# Altium PCB EB2018-LW27U19-P-MB03A(KL18).PcbDoc (part 1 of 2)
Units mm, origin at the board's own origin, x right, y up, seen from the top; angles counter-clockwise.
Board outline 338.42 x 232.18 mm, 2 copper layers (Top Layer, Bottom Layer); 163 components, 101 nets, 459 pads, 120 vias.
Unrouted connection lines stored in the file: 2.
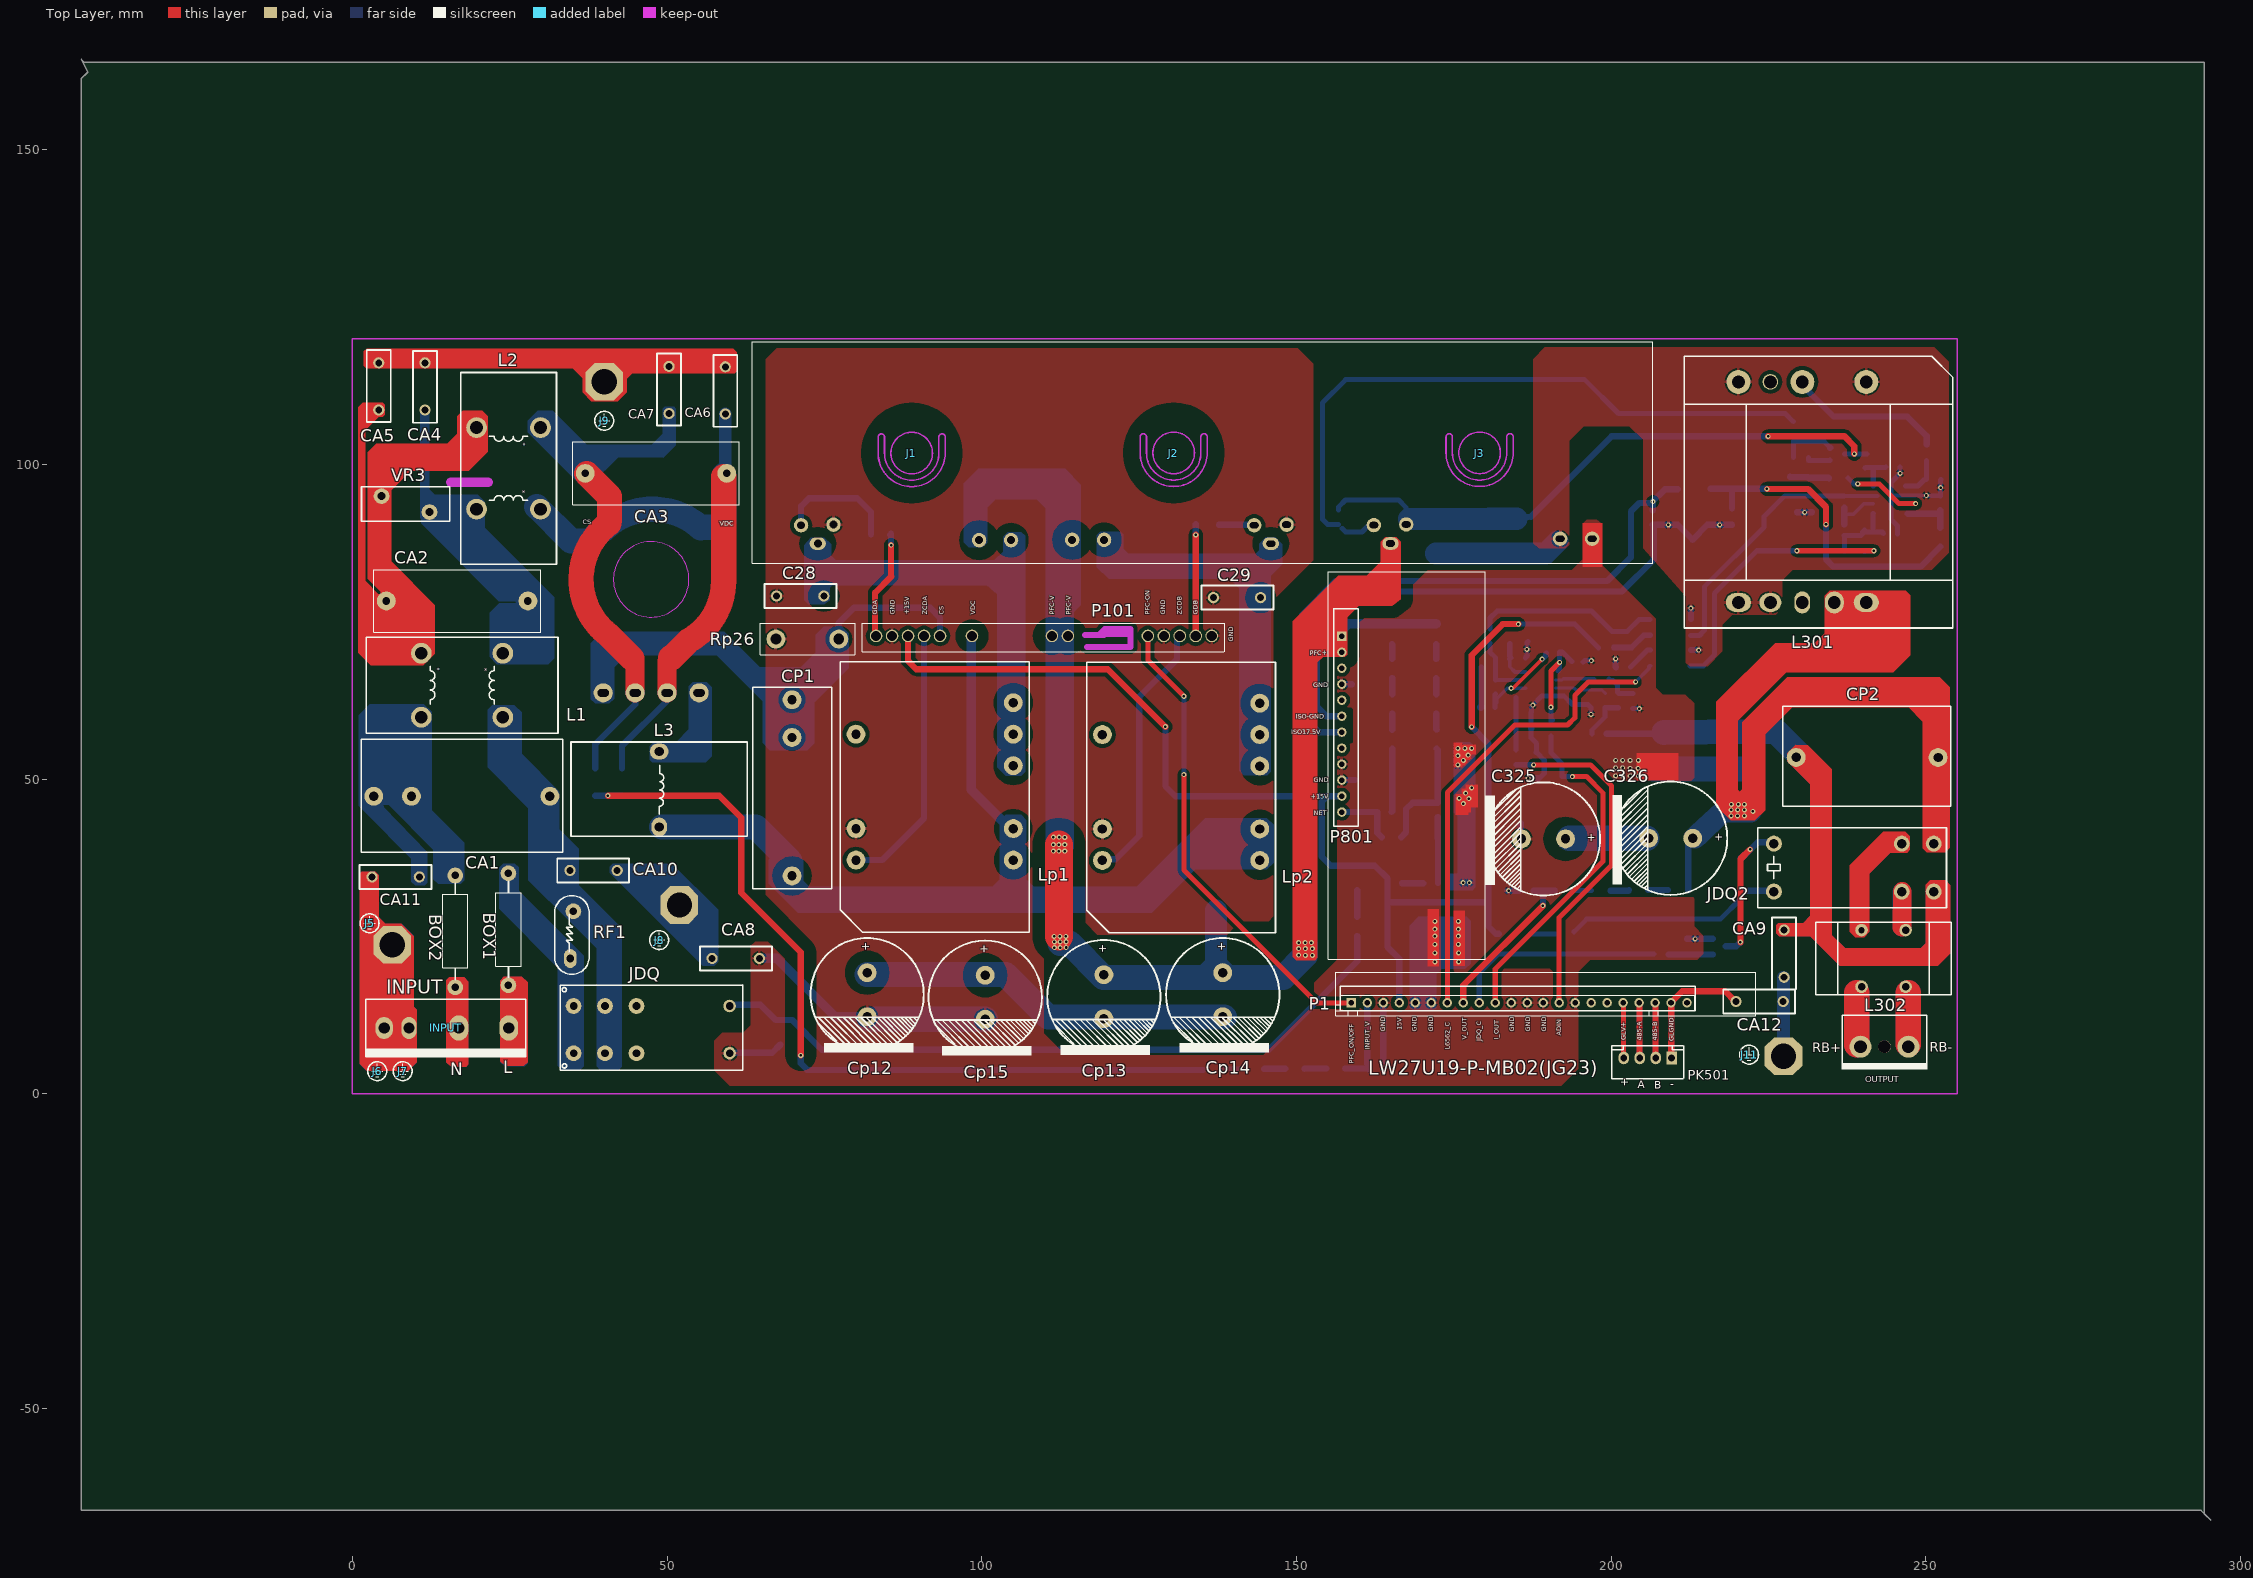
[diagram p0: Top Layer view]
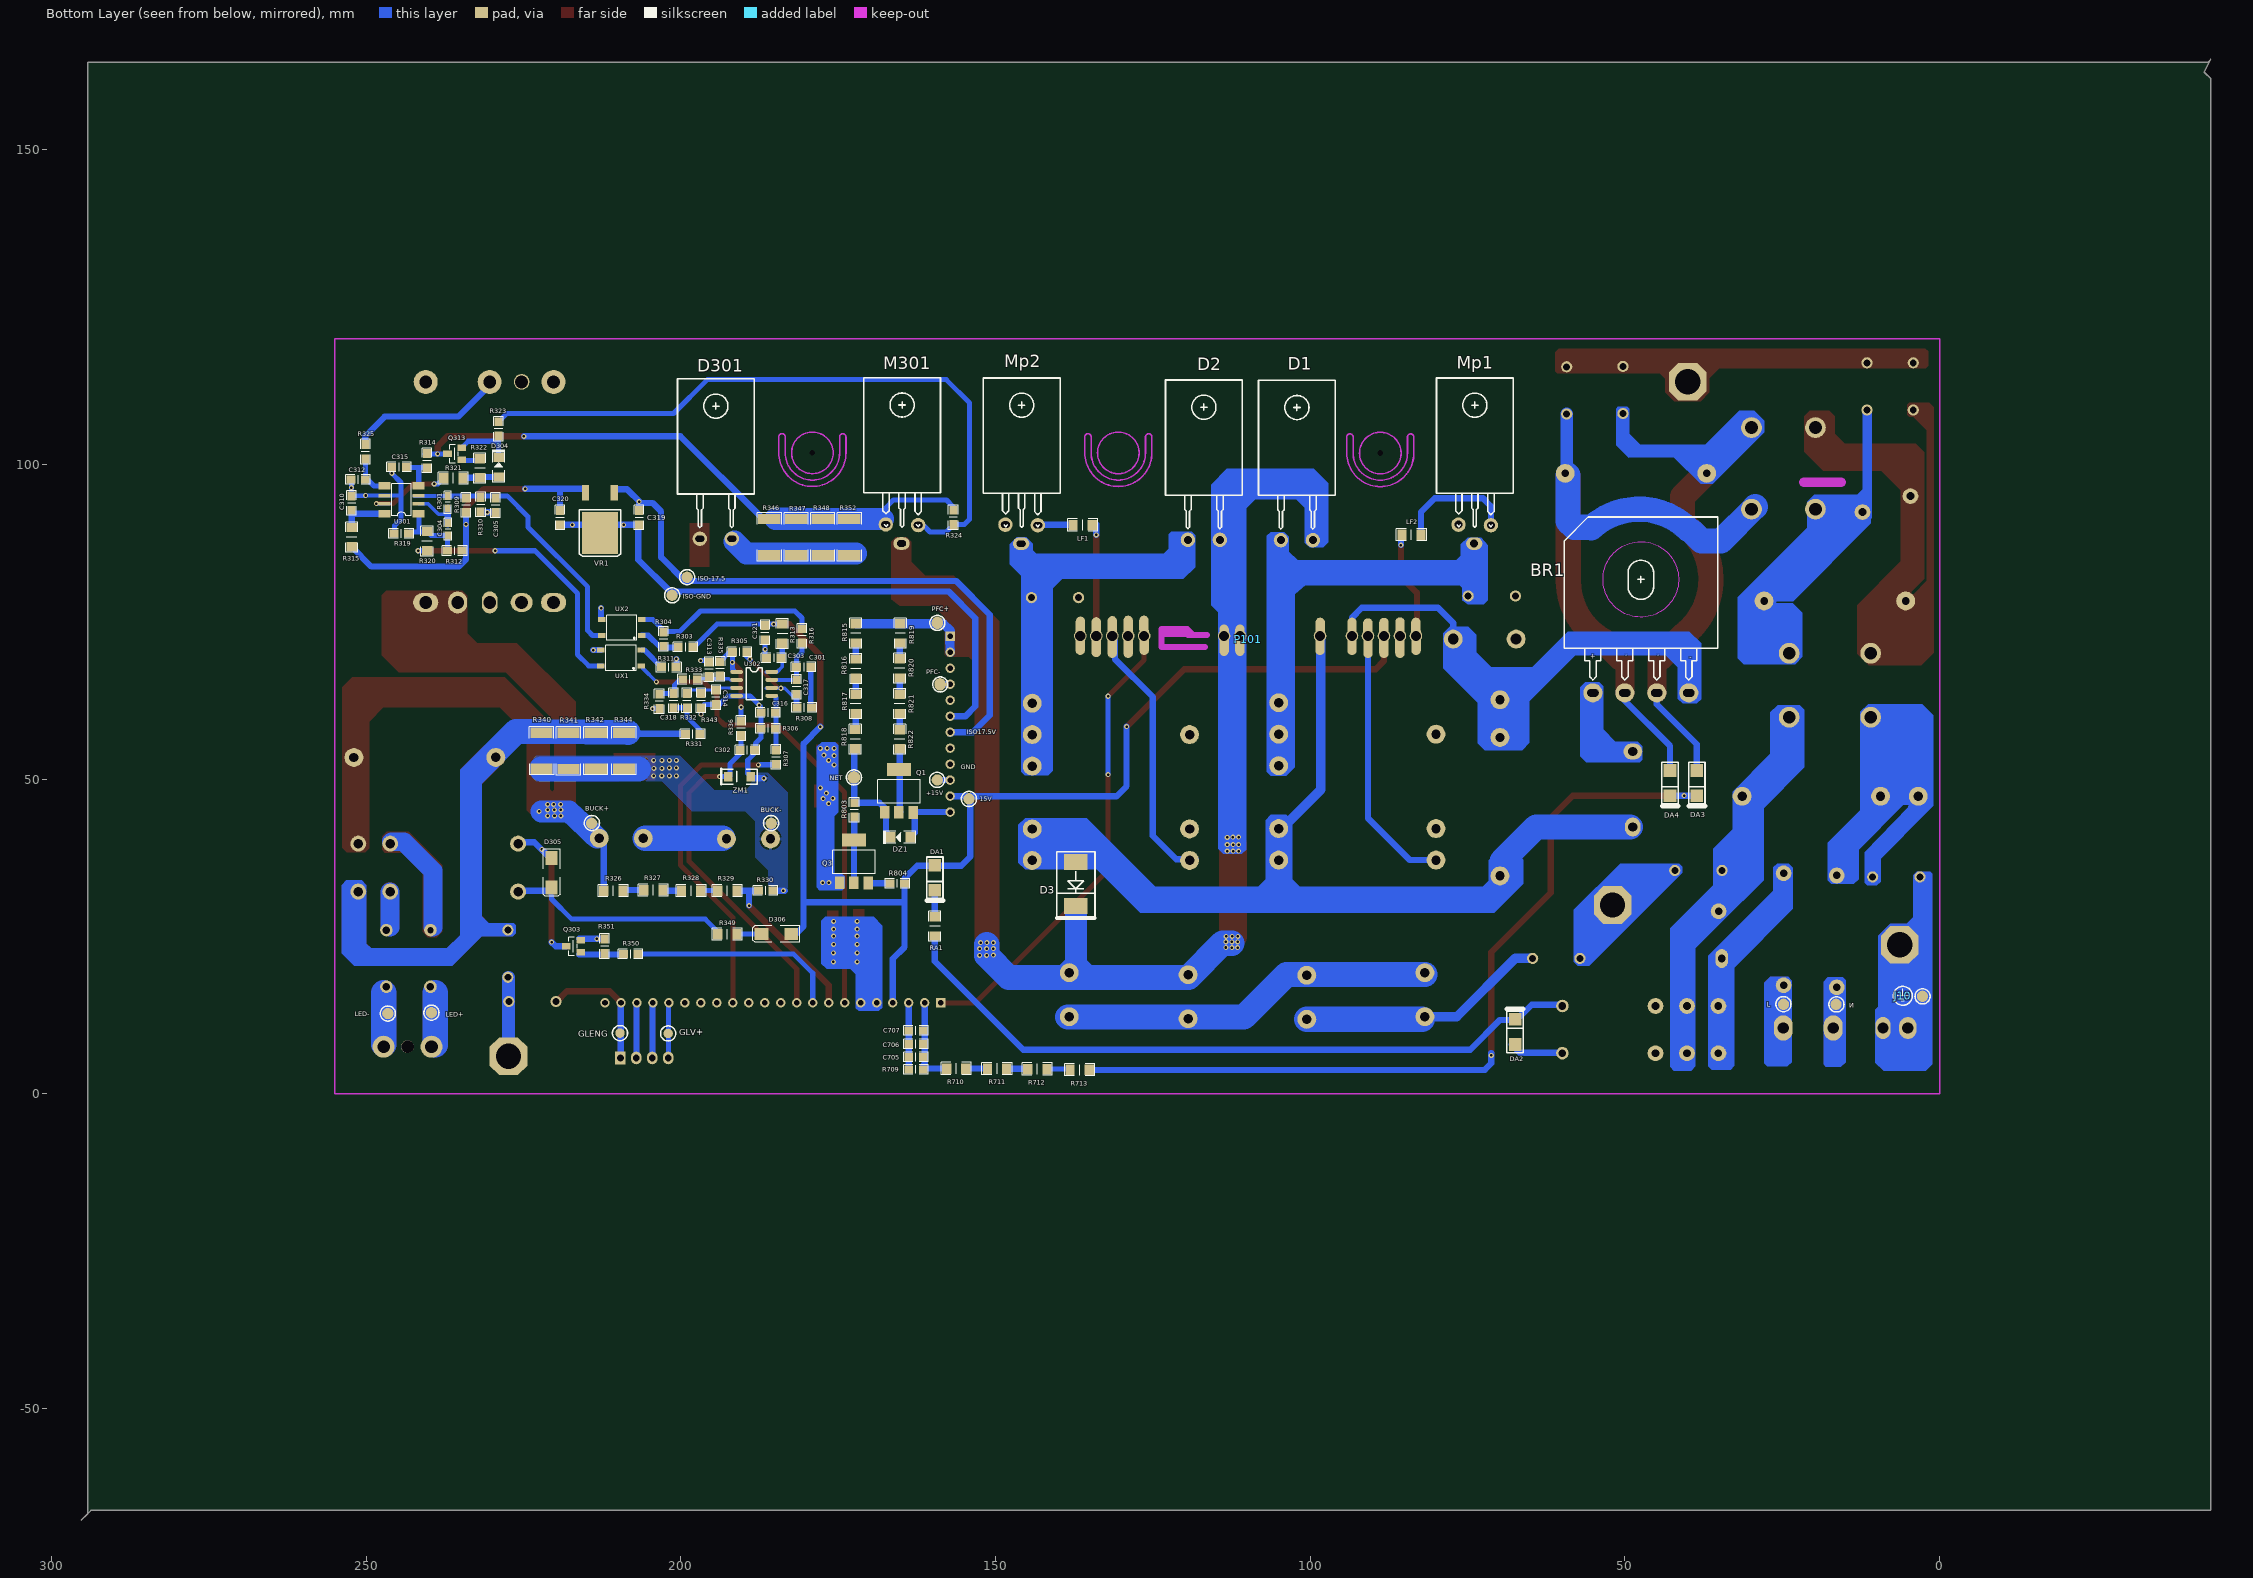
[diagram p1: Bottom Layer view, seen from below]

## Layer stack, top to bottom
Top Solder: solder mask 0.0102, Solder Resist, Dk 3.5
Top Layer: signal copper 0.0356
Dielectric1: dielectric 0.32, FR-4, Dk 4.8
Bottom Layer: signal copper 0.0356
Bottom Solder: solder mask 0.0102, Solder Resist, Dk 3.5

## Board outline
-43.105,164.407 -42.586,163.889 294.28,163.889 294.28,-66.735 295.316,-67.771 293.762,-66.217 -43.105,-66.217 -43.105,161.298 -42.068,162.334

## Design rules (kind name [scope] priority, off if disabled: settings)
Clearance Clearance_1 [InNet('NetDA3_2')] p1: gap=2 ignorepadtopadclearanceinfootprint=FALSE
Clearance Clearance_30 [InNet('NetC326_1')] p2: gap=2 ignorepadtopadclearanceinfootprint=FALSE
Clearance Clearance_29 [InNet('NetC325_1')] p3: gap=2 ignorepadtopadclearanceinfootprint=FALSE
Clearance Clearance_22 [InNet('NetCp12_1')] p4: gap=2 ignorepadtopadclearanceinfootprint=FALSE
Clearance Clearance_21 [InNet('PFC_V')] p5: gap=2 ignorepadtopadclearanceinfootprint=FALSE
Clearance Clearance_20 [InNet('NetC29_1')] p6: gap=1.6 ignorepadtopadclearanceinfootprint=FALSE
Clearance Clearance_19 [InNet('NetC28_1')] p7: gap=1.6 ignorepadtopadclearanceinfootprint=FALSE
Clearance Clearance_18 [InNet('VDC')] p8: gap=1.6 ignorepadtopadclearanceinfootprint=FALSE
Clearance Clearance_35 [InNamedPolygon('GND_L01_P051')] p9: gap=0.6 ignorepadtopadclearanceinfootprint=FALSE
Clearance Clearance_25 [InNet('ISO-GND')] p10: gap=0.6 ignorepadtopadclearanceinfootprint=FALSE
Clearance Clearance_34 [InNet('NetDA3_2')] p11: gap=0.6 ignorepadtopadclearanceinfootprint=FALSE
Clearance Clearance_33 [InNamedPolygon('GND_L01_P028')] p12: gap=0.6 ignorepadtopadclearanceinfootprint=FALSE
Clearance Clearance_32 [InNamedPolygon('GND_L01_P040')] p13: gap=0.6 ignorepadtopadclearanceinfootprint=FALSE
Clearance Clearance_31 [InNet('15V')] p14: gap=0.6 ignorepadtopadclearanceinfootprint=FALSE
Clearance Clearance_27 [InNamedPolygon('GND_L01_P038')] p15: gap=0.6 ignorepadtopadclearanceinfootprint=FALSE
Clearance Clearance_26 [InNamedPolygon('ISO-GND_L01_P036')] p16: gap=0.6 ignorepadtopadclearanceinfootprint=FALSE
Clearance Clearance_28 [InNamedPolygon('GND_L01_P038')] p17: gap=0.6 ignorepadtopadclearanceinfootprint=FALSE
Clearance [All] p18: gap=0.6 ignorepadtopadclearanceinfootprint=FALSE
DiffPairsRouting [All] p1: maxlimit=4.5 minlimit=0.508 mostfreqgap=0.508 toplayer_minwidth=0.381 toplayer_maxwidth=0.381 toplayer_prefwidth=0.381 bottomlayer_minwidth=0.381 bottomlayer_maxwidth=0.381 bottomlayer_prefwidth=0.381 maxuncoupledlength=12.7
PlaneClearance [All] p1: clearance=2
PlaneConnect [All] p1: planeconnectstyle=Relief reliefexpansion=0.508 reliefentries=4 reliefconductorwidth=1 reliefairgap=0.508
PolygonConnect [All] p1: connectstyle=Relief reliefconductorwidth=0.5 reliefentries=4 polygonreliefangle="90 Angle" airgapwidth=0.254
RoutingVias [All] p1: holewidth=0.4 width=0.8 viastyle="Through Hole" minholewidth=0.4 minwidth=0.8 maxholewidth=0.711 maxwidth=1.27
SMDToCorner [All] p1: distance=0
SilkToSolderMaskClearance SilkscreenOverComponentPads [IsPad] p1: minsilkscreentomaskgap=0.254 clearancetoexposedcopper=TRUE
SolderMaskExpansion [All] p1: expansion=0.102 istentingtop=FALSE
Width [All] p1: maxlimit=10 minlimit=0.254 preferedwidth=2 minimp=50.000000 maximp=50.000000 favimp=50.000000
26 further rules are at their usual default settings.

## Classes and differential pairs
component class "Components Class 1": C304 C305 C310 C312 C315 Q313 R301 R310 R312 R314 R315 R319 R320 R321 R322 R325 U301
component class LW1U21-MB03(HG27)-双通道3: BOX1 BOX2 BOX4 BR1 C28 C29 C301 C302 C303 C304 C305 C310 C312 C315 C316 C317 C318 C320 C321 C325 C326 C705 C706 C707 CA1 CA2 CA3 CA4 CA5 CA6 CA7 CA8 CA10 CA11 CA12 CP1 Cp12 Cp13 Cp14 Cp15 CX1 CX2 CX3 CY3 CY4 CY5 D1 D2 D3 D301 D304 D305 D306 DA1 DA2 DA3 DA4 DZ1 INPUT J1 J2 J3 J5 J6 JDQ JDQ2 L1 L2 L302 LF2 Lp2 M301 Mp1 Mp2 OUTPUT P1 Q1 Q3 Q303 Q313 R301 R305 R306 R307 R308 R309 R310 R312 R313 R314 R315 R316 R319 R320 R321 R322 R323 R324 R325 R331 R332 R333 R334 R335 R336 R340 R341 R342 R346 R347 R348 R349 R350 R351 R709 R710 R711 R712 R713 R803 R804 R815 R816 R817 R818 R819 R820 R821 R822 RA1 Rp26 RT? U301 U302 VR3 ZM1

## Components (designator, comment, footprint, x,y, rotation, side; value= is the part's Value field where it differs from the comment)
BOX1 "10A/350V" 10A保险 24.795,17.247 r90 top
BOX2 "10A/350V" 10A保险 16.341,34.689 r270 top
BR1 "" BRIDGE-TK 35.281,91.645 r0 bottom
C28 "221/1KV" Y2C 75.037,79.119 r270 top
C29 "221/1KV" Y2C 144.441,78.862 r270 top
C301 "" RW0805 180.521,67.796 r90 bottom
C302 "0805" RW0805 189.448,54.644 r270 bottom
C303 "301008" RW0805 185.265,69.278 r90 bottom
C304 "" RW0603 237.026,90.722 r0 bottom
C305 "301008" RW0805 229.461,93.526 r180 bottom
C310 "301009" RW0805 252.326,93.865 r180 bottom
C312 "301001" RW0805 251.301,97.615 r90 bottom
C313 "301013" RW0805 195.569,67.443 r0 bottom (schematic designator C321)
C314 "301013" RW0805 194.463,62.992 r0 bottom (schematic designator C321)
C315 "" RW0805 244.801,99.59 r90 bottom
C316 "301008" RW0805 186.145,60.564 r90 bottom
C317 "301008" RW0805 181.643,64.643 r180 bottom
C318 "0805" RW0805 201.2,62.484 r180 bottom
C319 "301013" RW0805 206.645,91.544 r0 bottom
C320 "301013" RW0805 219.238,91.544 r0 bottom
C321 "301013" RW0805 186.68,73.29 r0 bottom
C325 "302159" C250V/120uF 189.214,40.495 r180 top locked
C326 "302159" C250V/120uF 209.418,40.607 r180 top
C705 "301008" RW0805 162.661,5.842 r270 bottom
C706 "301008" RW0805 162.661,7.899 r270 bottom
C707 "301008" RW0805 162.661,10.063 r270 bottom
CA1 "0.22uF/440V" 2.2uF/400V#1 17.618,47.639 r0 top
CA2 "0.22uF/440V" "X2C-B 22-27" 27.896,78.305 r180 top
CA3 "0.22uF/400V" "X2C-B 22-27" 59.494,98.582 r180 top
CA4 "102/400V" Y2C 11.561,108.525 r180 top
CA5 "102/400V" Y2C 4.158,116.284 r0 top
CA6 "" Y2C 59.281,107.89 r180 top
CA7 "" Y2C 50.298,115.719 r0 top
CA8 "102/250V" Y2C 64.794,21.545 r270 top
CA9 "102/250V" Y2C 227.485,26.146 r0 top (schematic designator CA12)
CA10 "102/400V" Y2C 34.448,35.47 r90 top
CA11 "102/400V" Y2C 3.005,34.442 r90 top
CA12 "102/250V" Y2C 219.732,14.642 r90 top
CP1 "684 630V" 2.2UF/630VRCD 69.855,34.615 r90 top
CP2 "0.22uF/440V" 2.2uF/400V#2 238.197,53.792 r0 top (schematic designator CA1)
Cp12 "120UF/450V" C250V/120uF 81.786,15.694 r270 top
Cp13 "120UF/450V" C250V/120uF 119.416,15.364 r270 top
Cp14 "120UF/450V" C250V/120uF 138.303,15.691 r270 top
Cp15 "120UF/450V" C250V/120uF 100.549,15.275 r270 top
D1 "STTH810" U880#1 108.222,113.369 r0 bottom locked
D2 "STTH810" U880#1 123.005,113.42 r0 bottom locked
D3 "D19" D-SMC 137.265,36.835 r270 bottom
D301 "308006" U880#2 200.554,113.592 r0 bottom locked
D304 "307004" SOD-123 228.976,99.551 r180 bottom
D305 "M7" SMA 220.569,32.902 r90 bottom
D306 "M7" SMA 187.05,25.393 r180 bottom
DA1 "M7" M7 159.789,36.224 r270 bottom
DA2 "M7" M7 67.329,7.934 r90 bottom
DA3 "M7" M7 38.709,51.261 r270 bottom
DA4 "M7" M7 42.957,51.261 r270 bottom
DZ1 "15V/0.5W" SOD-123 165.114,40.764 r90 bottom
INPUT "INPUT" INPUT-JST-6P 24.837,10.452 r90 top
J1 "Socket" 螺丝孔 88.842,101.786 r0 top locked
J2 "Socket" 螺丝孔 130.472,101.812 r0 top locked
J3 "Socket" 螺丝孔 179.086,101.816 r0 top locked
J5 "Socket" 接地标志 2.727,27.094 r0 top
J6 "Socket" 接地标志 3.941,3.589 r0 top
J7 "Socket" 接地标志 7.991,3.589 r0 top (schematic designator J6)
J8 "Socket" 接地标志 48.743,24.42 r0 top (schematic designator J5)
J9 "Socket" 接地标志 40.012,106.945 r0 top (schematic designator J5)
J10 "Socket" 接地标志 5.835,15.565 r180 bottom (schematic designator J5)
J11 "Socket" 接地标志 221.937,6.212 r0 top (schematic designator J4)
JDQ "12DC16A220VAC" "RELAY-HF115F - 3" 48.163,9.952 r0 top
JDQ2 "HF115F" RELAY-HF115F 225.879,32.123 r0 top
L1 "1mH" L-EMC 17.429,64.917 r0 top
L2 "1mH" L-EMC 24.816,99.374 r270 top
L3 "Comment" "INDUCTANCE_CHA MO -LISHI _T28*15_p=12" 34.743,40.891 r0 top
L301 "EE42/20" EE42/20 220.242,78.097 r90 top
L302 "1mH" B-CM22X12 243.308,21.506 r0 top
LF1 "1206" RW1206 134.645,90.376 r90 bottom
LF2 "1206" RW1206 85.443,88.839 r270 bottom
Lp1 "340uH/EC42-15立式" W1U15-PF-5A 104.863,37.234 r180 top
Lp2 "340uH/EC42-15立式" W1U15-PF-5A 144.029,37.168 r180 top
M301 "314012" TO220-3#1 163.56,98.617 r0 bottom locked
Mp1 "25N80K5" TO220-3#2 72.554,98.592 r0 bottom locked
Mp2 "25N80K5" TO220-3#1 144.554,98.592 r0 bottom locked
OUTPUT "JST" JST-3.96-3P 239.637,7.476 r0 top
P1 "Header 22" HDR1X22 158.741,14.46 r0 top
P101 "APFC" 金手指-APFC 83.213,72.754 r0 top
P801 "Header 12" HDR1X12 157.223,72.7 r270 top
PK501 "Comment" 4针排座 209.644,5.689 r180 top
Q1 "" SOT-223-NPN 165.363,44.739 r180 bottom
Q3 "Z0107NN5AA4" SOT-223-NPN 172.514,33.539 r180 bottom
Q303 "2N3904" SOT-23-BEC 217.079,23.437 r90 bottom
Q313 "309005" SOT-23-BEC 235.976,101.69 r90 bottom
R301 "" RW0603 237.051,92.965 r180 bottom
R303 "" RW0805 199.28,70.991 r90 bottom
R304 "" RW0805 202.77,72.247 r180 bottom
R305 "" RW0805 190.684,70.229 r90 bottom
R306 "" RW0805 186.156,58.076 r270 bottom
R307 "303020" RW0805 184.881,53.501 r0 bottom
R308 "303046" RW0805 180.415,61.39 r90 bottom
R309 "" RW0805 234.161,93.53 r0 bottom
R310 "" RW0805 231.818,93.627 r180 bottom
R311 "" RW0805 201.936,67.78 r90 bottom
R312 "303053" RW0805 235.957,86.289 r90 bottom
R313 "303074" RW1206 183.906,71.587 r180 bottom
R314 "" RW0805 240.351,100.615 r180 bottom
R315 "303074" RW1206 252.326,89.965 r0 bottom
R316 "0805" RW0805 180.778,72.754 r0 bottom
R319 "" RW0805 244.451,89.04 r270 bottom
R320 "" RW1206 240.351,86.289 r180 bottom
R321 "303075" RW1206 234.628,97.815 r90 bottom
R322 "" RW1206 231.953,97.881 r180 bottom
R323 "303073" RW0805 228.972,105.651 r180 bottom
R324 "303043" RW0805 156.729,91.595 r0 bottom
R325 "303055" RW0805 250.158,102.023 r180 bottom
R326 "303094" RW1206 212.264,32.272 r270 bottom
R327 "303094" RW1206 205.905,32.367 r270 bottom
R328 "303094" RW1206 199.921,32.281 r270 bottom
R329 "303094" RW1206 194.142,32.281 r270 bottom
R330 "303033" RW0805 186.542,32.281 r90 bottom
R331 "0805" RW0805 198.137,57.187 r270 bottom
R332 "0805" RW0805 199.078,62.484 r180 bottom
R333 "0805" RW0805 198.57,65.869 r90 bottom
R334 "0805" RW0805 203.451,62.358 r0 bottom
R335 "0805" RW0805 193.803,67.517 r180 bottom
R336 "0805" RW0805 190.456,58.076 r0 bottom
R340 "" RW2512 222.156,51.627 r180 bottom
R341 "" RW2512 217.865,51.604 r180 bottom
R342 "" RW2512 213.553,51.629 r180 bottom
R343 "0805" RW0805 196.818,62.484 r180 bottom (schematic designator R332)
R344 "" RW2512 209.057,51.629 r180 bottom (schematic designator R342)
R346 "" RW2512 185.951,91.333 r0 bottom
R347 "" RW2512 181.696,91.333 r0 bottom
R348 "" RW2512 177.468,91.333 r0 bottom
R349 "1206" RW1206 191.094,25.336 r90 bottom
R350 "0805" RW0805 208.001,22.187 r90 bottom
R351 "0805" RW0805 212.126,23.437 r0 bottom
R352 "" RW2512 173.244,91.333 r0 bottom (schematic designator R348)
R709 "303046" RW0805 162.661,3.886 r270 bottom
R710 "303098" RW1206 154.736,4.006 r90 bottom
R711 "303098" RW1206 148.255,3.997 r90 bottom
R712 "303098" RW1206 141.849,3.928 r90 bottom
R713 "303098" RW1206 135.128,3.794 r90 bottom
R803 "0805" RW0805 172.464,45.114 r0 bottom
R804 "0805" RW0805 165.627,33.439 r90 bottom
R815 "1206" RW1206 172.214,74.689 r0 bottom
R816 "1206" RW1206 172.214,69.089 r0 bottom
R817 "1206" RW1206 172.239,63.489 r0 bottom
R818 "1206" RW1206 172.289,57.889 r0 bottom
R819 "1206" RW1206 165.139,74.689 r0 bottom
R820 "1206" RW1206 165.239,69.112 r0 bottom
R821 "1206" RW1206 165.239,63.487 r0 bottom
R822 "1206" RW1206 165.239,57.862 r0 bottom
RA1 "62" RW1206 159.67,25.065 r180 bottom
RF1 "Comment" 热敏电阻 34.514,25.563 r0 top
Rp26 "0.010" 康铜丝 77.329,72.181 r180 top
U301 "311046" SO-8 244.401,94.39 r90 bottom
U302 "311026" SOP-8 191.156,67.036 r270 bottom
UX1 "317001" LTV 209.523,69.278 r90 bottom
UX2 "317001" LTV 209.418,74.106 r90 bottom
VR1 "LM7815" 78M05 210.608,95.486 r0 bottom
VR3 "20D781" YAMIN-7.62 8.441,93.702 r180 top
ZM1 "5.1V" 二极管 188.901,50.403 r0 bottom
? "Comment" XH-20#1 157.204,27.089 r90 top locked
? "Comment" XH-20#2 138.575,87.613 r0 top
? "Comment" XH-20#1 158.741,14.46 r0 top

## Footprints (in the part's own frame and the unit in brackets; to place one, negate y for a bottom-side part, rotate by r counter-clockwise, add the part's x,y. Pads: shape width x height; smd on the part's side, far side on the other; paste and mask are expansions set on the pad)
2.2uF/400V#1 [mm]
  round 3 hole 1.5: 1(13.77,-0.356) 2(-14.23,-0.356) 2(-8.23,-0.356)
  silkscreen extent -16.23,-9.25 15.77,8.66
2.2uF/400V#2 [mm]
  round 3 hole 1.5: 1(13.77,-0.356) 2(-8.775,-0.35)
  silkscreen extent -10.87,-8.07 15.77,7.78
2.2UF/630VRCD [mm]
  round 3 hole 1.5: 1(0,0) 2(22,0) 2(28,0)
  silkscreen extent -2,-6.27 30,6.23
4针排座 [mm]
  rect 1.7x2 hole 1.1: 1(0,0)
  oval 1.7x2 hole 1.1: 2(2.54,0) 3(5.08,0) 4(7.62,0)
  silkscreen extent -1.88,-1.98 9.5,3.3
10A保险 [mm]
  round 2.5 hole 1.2: 1(0,0) 2(17.78,0)
  silkscreen extent 1.27,-2 16.51,2
78M05 [mil]
  rect 45x98.43 smd: 1(0,0) 3(179,0)
  rect 225x265 smd: 2(89,251)
  silkscreen extent -41,106 219,396
B-CM22X12 [mm]
  round 2 hole 1.2: 1(3.5,4.5) 2(3.5,-4.5) 4(-3.5,-4.5)
  round 2 hole 1: 3(-3.5,4.5)
  silkscreen extent -10.75,-5.75 10.75,5.75
BRIDGE-TK [mil]
  round 120 hole 47.24 slot 70.87 at 0 deg: 1(180,1100) 2(380,1100) 3(580,1100) 4(780,1100)
  silkscreen extent 0,0 960,1020
C250V/120uF [mm]
  round 3 hole 1.5: 1(-3.556,0) 2(3.444,0)
  silkscreen extent -9.06,-9 9.17,9
D-SMC [mm]
  rect 2.5x3.8 smd: A(0,0) K(7,0)
  silkscreen extent -1.65,-3.05 8.9,3.05
EE42/20 [mil]
  round 150 hole 80: 2(1379,-800) 4(1379,-400) 6(1378.98,0)
  round 98.43 hole 80: 5(1378.98,-200)
  oval 118.11x157.48 hole 80: 7(-1,0) 11(-1,-800)
  oval 118.11x137.8 hole 80: 8(-1,-200)
  oval 137.8x98.43 hole 80: 9(-1,-400)
  oval 137.8x118.11 hole 80: 10(-1,-600)
  silkscreen extent -161,-1340 1539,340
HDR1X12 [mm] "Connector; H"
  rect 1.5x1.5 hole 0.9: 1(0,0)
  round 1.5 hole 0.9: 2(2.54,0) 3(5.08,0) 4(7.62,0) 5(10.16,0) 6(12.7,0) 7(15.24,0) 8(17.78,0) 9(20.32,0) 10(22.86,0) 11(25.4,0) 12(27.94,0)
  silkscreen extent -4.36,-1.27 30.21,2.62
HDR1X22 [mm] "Connector; H"
  rect 1.5x1.5 hole 0.9: 1(0,0)
  round 1.5 hole 0.9: 2(2.54,0) 3(5.08,0) 4(7.62,0) 5(10.16,0) 6(12.7,0) 7(15.24,0) 8(17.78,0) 9(20.32,0) 10(22.86,0) 11(25.4,0) 12(27.94,0) 13(30.48,0) 14(33.02,0) 15(35.56,0) 16(38.1,0) 17(40.64,0) 18(43.18,0) 19(45.72,0) 20(48.26,0) 21(50.8,0) 22(53.34,0)
  silkscreen extent -1.78,-1.27 54.61,2.6
"INDUCTANCE_CHA MO -LISHI _T28*15_p=12" [mm]
  oval 3x2.5 hole 1.5: 1(14,13.5)
  oval 2.5x3 hole 1.5: 2(14,1.5)
  silkscreen extent 0,0 28,15
INPUT-JST-6P [mm]
  oval 4x3 hole 1.8: 1(0,0) 2(0,7.92)
  oval 3.5x2.8 hole 1.8: 3(0,19.8)
  oval 3.5x2.4 hole 1.8: 3(0,15.84)
  silkscreen extent -4.58,-2.7 4.57,22.72
JST-3.96-3P [mm]
  round 3.5 hole 2: 1(0,0) 3(7.62,0)
  round 2 hole 2: 2(3.81,0)
  silkscreen extent -3.05,-3.58 10.67,5.02
L-EMC [mil]
  round 130 hole 80: 1(-255,-200) 2(-255,200) 3(255,-200) 4(255,200)
  silkscreen extent -600,-300 600,300
LTV [mm]
  rect 0.8x1.2 smd: 1(-1.27,-3.2) 2(1.23,-3.2) 3(1.27,3.2) 4(-1.27,3.2)
  silkscreen extent -2.04,-2.4 1.96,2.4
M7 [mil]
  rect 79x79 smd: A(-4.06,4.96) K(153.42,4.96)
  silkscreen extent -55,-46 218,56
RELAY-HF115F [mil]
  round 100 hole 60: 1(0,300) 2(0,0) 3(800,300) 4(800,0) 5(1000,300) 6(1000,0)
  silkscreen extent -100,-100 1080,400
"RELAY-HF115F - 3" [mm]
  round 2.5 hole 1.2: 1(-13.023,-3.505) 1(-13.023,3.995) 2(-8.023,-3.505) 2(-8.023,3.995) 5(-3.023,3.995) 5(-3.023,-3.505)
  round 2 hole 1.2: 3(11.777,-3.505) 4(11.777,3.995)
  silkscreen extent -15.12,-6.22 13.88,7.33
RW0603 [mil]
  rect 35x50 smd: 1(0,0) 2(0,80)
  silkscreen extent -23,-30 23,110
RW0805 [mil]
  rect 50x55 smd: 1(0,-45) 2(0,45)
  silkscreen extent -30,-77 30,77
RW1206 [mil]
  rect 66x58 smd: 1(0,0) 2(0,120)
  silkscreen extent -38,-34 38,154
RW2512 [mil]
  rect 140x65 smd: 1(0,0) 2(0,227)
  silkscreen extent -76,-38 76,265
SMA [mil]
  rect 87x75 smd: A(180,0) K(-6,0)
  silkscreen extent -60,-53 234,53
SO-8 [mil]
  rect 47.24x75 smd: 1(-86.61,-107.5) 4(86.61,-107.5) 5(86.61,107.5) 8(-86.61,107.5)
  rect 24x75 smd: 2(-24.8,-107.5) 3(25.2,-107.5) 6(25.2,107.5) 7(-24.8,107.5)
  silkscreen extent -100,-62 100,62
SOD-123 [mil]
  rect 66x58 smd: A(0,-61) K(0,61)
  silkscreen extent -41,-95 41,110
SOP-8 [mil]
  oval 24x80 smd: 1(0,0) 2(50,0) 3(100,0) 4(150,0) 5(150,220) 6(100,220) 7(50,220) 8(0,220)
  silkscreen extent -25,60 175,160
SOT-23-BEC [mil]
  rect 40x55 smd: B(-38,-45) C(0,45) E(38,-45)
  silkscreen extent -58,-24 57,30
SOT-223-NPN [mil]
  rect 60x80 smd: B(-90,0) C(0,0) E(90,-1)
  rect 150x80 smd: C(0,268)
  silkscreen extent -132,56 132,204
TO220-3#1 [mm]
  oval 2.6x2 hole 1 slot 1.4 at 0 deg: D(1.394,11.176)
  round 2.286 hole 1 slot 1.4 at 0 deg: G(-1.256,8.251) S(3.894,8.151)
  silkscreen extent -4.8,-15.15 7.39,8.57
TO220-3#2 [mm]
  oval 2.6x2 hole 1.27: D(1.394,11.176)
  round 2.286 hole 1.27: G(-1.256,8.251) S(3.894,8.151)
  silkscreen extent -4.8,-15.15 7.39,8.57
U880#1 [mil]
  round 90 hole 50: 1(-340,1000) 3(-140,1000)
  silkscreen extent -480,0 0,930
U880#2 [mil]
  round 90 hole 39.37 slot 55.12 at 0 deg: 1(-340,1000) 3(-140,1000)
  silkscreen extent -480,0 0,930
W1U15-PF-5A [mm]
  round 0 all layers, no hole: 1(24.841,-24.908)
  round 3 hole 1.5: 2(24.841,-19.908) 4(24.841,-4.908) 5(24.841,0.092) 9(-0.16,0.093) 10(-0.159,-4.908) 12(-0.159,-14.908) 13(-0.159,-19.908) 14(-0.159,-24.908)
  silkscreen extent -2.66,-31.41 27.34,11.59
"X2C-B 22-27" [mm]
  round 3 hole 1.2: 1(0,0) 2(22.5,0)
  silkscreen extent -2,-5 24.5,5
XH-20#1 [mm]
  silkscreen extent -5.71,-22.83 55.88,2.1
XH-20#2 [mm]
  round 0 hole 0.9: 18(-49.7,14.197)
  rect 0x0 hole 0.9: 19(40.544,14.227)
  silkscreen extent -75.06,-3.3 68.07,31.92
Y2C [mil]
  round 70 hole 43.31: 1(1.09,-5.11) 2(1.09,-300.38)
  silkscreen extent -74,-375 76,75
YAMIN-7.62 [mm]
  round 2.5 hole 1.3: 1(-3.81,1.27) 2(3.81,-1.27)
  silkscreen extent -7,-2.75 7,2.75
二极管 [mm]
  rect 1.35x1.5 smd: 1(0,0) 2(3.6,0)
  silkscreen extent -1.02,-1.2 4.7,1.2
康铜丝 [mm]
  round 3 hole 1.7: 1(10.033,-0.073) 2(0.033,-0.073)
  silkscreen extent -2.47,-2.57 12.53,2.43
接地标志 [mm]
  silkscreen extent -1.5,-1.5 1.5,1.5
热敏电阻 [mm]
  round 2.5 hole 1.2: 1(0.606,3.429)
  oval 2x3 hole 1.2: 2(0.106,-4.071)
  silkscreen extent -2.39,-6.57 3.11,5.93
螺丝孔 [mm]
  Keep-Out Layer circle w0.254: c0.033,0.024 r3.302
  Keep-Out Layer lines w0.254: -5.301,0.024 ccw(c0.033,0.024) 5.367,0.024 5.367,2.564 ccw(c4.859,2.564) 4.351,2.564 4.351,0.024 cw(c0.033,0.024) -4.285,0.024 -4.285,2.564 ccw(c-4.793,2.564) -5.301,2.564 -5.301,0.024
金手指-APFC [mm]
  oval 1.5x4.5 smd far side: 1(53.34,-0.787) 5(43.18,-0.787) 16(15.24,-0.787) 18(10.16,-0.787) 22(-0.025,-0.787)
  round 2 hole 1.6: 1(53.34,0) 2(50.8,0) 3(48.26,0) 4(45.72,0) 5(43.18,0) 10(30.48,0) 11(27.94,0) 16(15.24,0) 18(10.16,0) 19(7.62,0) 20(5.08,0) 21(2.54,0) 22(0,0)
  oval 1.5x5 smd far side: 2(50.8,-0.889) 3(48.26,-1.016) 4(45.72,-1.016) 10(30.48,-0.686) 11(27.965,-0.686) 19(7.62,-1.016) 20(5.08,-1.016) 21(2.54,-1.016)
  Keep-Out Layer lines w1: 33.228,0.147 36.228,0.147 36.578,0.397 35.878,0.497 35.878,0.597 ; 33.528,-1.753 40.428,-1.753 40.428,1.047 39.328,1.047 36.328,1.047 35.628,0.347 ; 36.028,0.447 36.228,0.247 36.328,0.347 39.828,0.347
  silkscreen extent -2.16,-2.54 55.37,2

## Part data
D1 D2: library part "Diode 1N914", "High Condu"
DZ1: library part "D Schott"
M301: library part MO
Mp1 Mp2: library part MOSFET-N
P1: "Header, 22-Pin"
P801: "Header, 12-Pin"
Q1: library part NMOS-2, "N-Cha"
Q3: library part PUT, "Programmable Uniju"

## Free pads (board coordinates)
  oct 6x6 hole 4: 0(6.343,23.668) 0(40.012,113.15) 0(51.954,30) 0(227.408,5.953)
  round 2 smd far side: 0(172.514,50.264)
  oval 1.8x2 smd far side: 9(158.818,65.051) 9(159.262,74.832)
  round 1.8 smd far side: 12(2.727,15.488) 12(16.453,14.209) 12(24.795,14.209) 12(154.252,46.866) 12(159.262,49.866) 12(185.658,42.977) 12(199.02,82.071) 12(201.409,79.22) 12(214.193,42.977) 12(246.581,12.75) 13(239.657,12.884)
  round 1.5 smd far side: 14(202.041,9.585) 15(209.69,9.637)
  oval 1.5x3 smd far side: 16(83.215,74.164) 17(85.743,74.209) 18(88.293,74.142) 19(90.843,74.053) 20(126.432,74.477) 21(128.938,74.478) 22(134.016,74.231) 23(136.521,74.321) 24(131.466,74.411) 25(98.426,74.164) 26(93.369,74.152)

## Via types
v1: diameter 0.8, hole 0.4, Top Layer to Bottom Layer, 120 vias

## Nets (pads, with @x,y where several pads share a name; then routed paths per layer and width w, separated by ;. In a path a pad name is that pad's centre, name@x,y a point inside that pad or via, vN(x,y) a via of type N, cw(c..) or ccw(c..) an arc to the next point about the centre after c; other vN are vias at no path point)
15V: C321.1 D306.A DA1.A P1.4 P101.20 P801.11 pad.12@154.252,46.866 pad.18 R303.1 R313.2 R804.1 | length 216.3
  Top Layer w1: P101.20@88.293,72.754 88.293,68.797 89.611,67.478 120.038,67.478 v1(129.191,58.325) ; v1(177.852,58.315) 177.852,69.696 182.791,74.634 v1(185.264,74.634)
  Bottom Layer w0.8: R313.2@184.544,74.635 194.252,74.635 R303.1@198.017,70.87
  Bottom Layer w1: v1(129.191,58.325) 129.191,48.891 130.782,47.3 154.252,47.3 pad.12@154.911,47.3 ; P801.11@157.223,47.3 pad.12@154.911,47.3 ; 164.744,30.421 180.521,30.421 ; P1.4@166.361,14.46 166.361,21.435 164.484,23.312 R804.1@164.484,33.439 164.484,34.219 162.478,36.225 155.485,36.225 154.02,37.69 154.02,46.409 pad.12@154.911,47.3 ; v1(177.852,58.315) 180.521,55.646 180.521,30.421 ; D306.A@182.172,25.424 181.698,25.424 180.521,26.6 180.521,30.421
485_A: P1.19 PK501.3 | length 17.6
  Top Layer w1: P1.19@204.461,14.46 204.512,14.409 204.512,5.74 PK501.3@204.563,5.689
  Bottom Layer w0.5: P1.19@204.461,14.46 P1.19@204.512,14.409 ; PK501.3@204.512,5.74 PK501.3@204.563,5.689
  Bottom Layer w1: PK501.3@204.512,5.74 P1.19@204.512,14.409
485_B: P1.20 PK501.2 | length 17.6
  Top Layer w1: P1.20@207.001,14.46 207.052,14.409 207.052,5.74 PK501.2@207.103,5.689
  Bottom Layer w1: P1.20@207.001,14.46 207.052,14.409 207.052,5.74 PK501.2@207.103,5.689
AC1: BR1.3 CA3.1 CA6.1 DA4.A L2.4 | length 102.9
  Top Layer w3: BR1.3@50.013,63.705 50.013,68.785 50.521,69.293
  Top Layer w4: 50.521,69.293 50.752,69.293 53.07,71.611 ; 53.439,72.002 ccw(c48.241,81.364) 58.948,81.207 ; 59,81.364 CA3.1@59,98.094
  Bottom Layer w1: DA4.A@42.831,51.732 42.831,55.258 50.013,62.44 BR1.3@50.013,63.705 ; CA3.1@59.253,98.822 CA3.1@59.494,98.582
  Bottom Layer w2: CA3.1@59.253,98.822 CA6.1@59.253,108.019
  Bottom Layer w4: L2.4@29.292,93.279 34.735,87.836 37.83,87.836 39.345,89.35 ; 39.939,89.69 cw(c47.755,81.755) 55.362,89.892 ; 55.601,90.019 58.079,90.019 59.022,90.963 CA3.1@59.022,98.279
AC2: BR1.2 CA3.2 CA7.2 DA3.A L2.2 | length 54.4
  Top Layer w3: 44.425,69.141 44.933,68.633 BR1.2@44.933,63.705
  Top Layer w4: CA3.2@37.23,98.582 40.87,94.889 40.843,91.07 ; 40.071,73.416 cw(c47.473,81.739) 40.776,90.639 ; 40.599,72.975 44.425,69.149 44.425,69.141
  Bottom Layer w1: DA3.A@38.583,51.732 38.583,55.543 44.933,61.893 BR1.2@44.933,63.705
ADIN: P1.14 R307.2 | length 54.2
  Top Layer w0.8: v1(187.685,52.269) 196.747,52.269 200.101,48.915 200.101,36.343 191.761,28.003 P1.14@191.761,14.46
  Bottom Layer w0.8: R307.2@184.881,52.285 v1@187.321,52.285
CS: BR1.1 CP1.2 P101.18 pad.26 Rp26.2 | length 22.8
  Bottom Layer w1: Rp26.2@77.296,72.666 77.296,74.806 79.703,77.213 91.803,77.213 93.373,75.642 P101.18@93.373,72.754
EARTH: CA11.1 INPUT.3 pad.0@6.343,23.668 pad.12@2.727,15.488
EARTH1: CA8.2 CA10.2 pad.0@51.954,30
EARTH2: CA4.2 CA5.1 CA6.2 CA7.1 pad.0@40.012,113.15
EARTH3: CA9.2 CA12.2 pad.0@227.408,5.953 | length 12.6
  Bottom Layer w2: pad.0@227.408,5.953 CA9.2@227.408,18.517
GDA: LF2.1 P101.22 pad.16 | length 17.5
  Top Layer w1: P101.22@83.056,72.754 83.056,79.616 85.642,82.202 85.595,82.248 v1(85.595,87.186)
  Bottom Layer w1: LF2.1@85.443,88.839 85.595,88.991 v1(85.595,87.186)
GDB: LF1.1 P101.2 pad.22 | length 16.8
  Top Layer w1: P101.2@134.014,73.676 v1(134.014,88.81)
  Bottom Layer w1: v1@134.014,88.81 LF1.1@134.014,90.511
GL15V: P1.18 pad.14 PK501.4 | length 17.6
  Top Layer w0.8: P1.18@201.921,14.46 201.972,14.409 201.972,5.74 PK501.4@202.023,5.689
  Bottom Layer w0.8: P1.18@201.921,14.46 201.972,14.409 201.972,5.74 PK501.4@202.023,5.689
GLGND: CA12.1 P1.21 pad.15 PK501.1 | length 29.7
  Top Layer w1: PK501.1@209.643,5.689 209.592,5.74 209.592,14.409 P1.21@209.541,14.46 209.541,14.536 211.315,16.31 218.123,16.31 219.763,14.67 CA12.1@219.861,14.67
  Bottom Layer w1: P1.21@209.541,14.46 209.592,14.409 209.592,5.74 PK501.1@209.643,5.689 ; CA12.1@219.651,14.46 CA12.1@219.861,14.67
GND: C28.2 C29.2 C302.2 C303.2 C313.1 C314.2 C316.2 C321.2 C325.2 C705.1 C706.1 C707.1 CA8.1 Cp12.2 Cp15.2 D301.3 DA2.A JDQ.3 Lp1.4 Lp2.4 Mp1.S Mp2.S P1.3 P1.5 P1.6 P1.11 P1.12 P1.13 P1.15 P101.1 P101.4 P101.21 P801.4 P801.9 P801.10 pad.9@158.818,65.051 pad.12@159.262,49.866 pad.12@185.658,42.977 pad.17 pad.21 pad.23 Q3.B Q303.E R306.1 R311.1 R330.1 R334.2 R340.1 R341.1 R342.1 R343.1 R344.1 R351.1 R709.1 Rp26.1 U302.4 ZM1.1 | length 122.6
  Bottom Layer w0.8: Mp2.S@148.448,90.441 148.733,90.441 Mp2.S@148.755,90.441 ; C303.2@186.408,69.278 186.637,69.508 C303.2@186.637,69.564 ; C303.2@186.424,69.351 C303.2@186.637,69.564 ; C303.2@186.706,69.633 C303.2@186.637,69.564 ; C321.2@186.833,71.893 186.637,71.697 v1(186.637,70.631) C303.2@186.637,69.564 ; C302.2@188.075,54.226 C302.2@188.138,54.226 ; ZM1.1@188.714,50.216 ZM1.1@188.901,50.403 189.39,50.892 189.39,52.997 188.824,53.563 188.824,53.584 188.182,54.226 188.177,54.642 188.165,55.683 187.288,56.56 C316.2@187.288,60.564 187.374,60.65 187.374,61.563 v1(187.569,61.759) 189.037,63.226 U302.4@191.156,63.226 192.506,63.226 193.883,61.849 C314.2@194.463,61.849 196.31,61.849 R343.1@196.818,61.341 v1(196.818,60.275) ; C313.1@195.569,68.586 195.801,68.818 v1(196.867,68.818) ; R334.2@203.451,61.215 v1(204.517,61.215)
  Bottom Layer w1: JDQ.3@60.3,6.509 66.705,6.509 DA2.A@68.028,7.831 ; CA8.1@64.664,21.837 CA8.1@64.983,21.518 ; Mp2.S@148.615,90.323 Mp2.S@148.733,90.441 ; P801.10@157.223,49.84 pad.12@159.262,49.866 ; P801.4@157.223,65.08 157.237,65.065 158.803,65.065 pad.9@158.818,65.051 ; R709.1@163.804,3.886 163.821,3.903 P1.3@163.821,14.46 ; Q3.B@174.808,33.539 v1@177.882,33.539 ; v1@183.528,32.272 R330.1@185.368,32.272 ; C325.2@185.658,40.495 pad.12@185.658,42.977 ; v1(186.836,50.129) ZM1.1@188.498,50.129 ; R306.1@187.299,58.076 R306.1@187.374,58.076 ; v1(200.716,69.089) 200.716,67.857 R311.1@200.793,67.78 ; R351.1@212.06,24.618 212.126,24.618 v1(213.373,24.621) 215.936,24.629 Q303.E@216.142,24.629
  Bottom Layer w1.5: CA8.1@64.983,21.518 67.455,21.518 76.722,12.25 Cp12.2@81.786,12.25
  Bottom Layer w4: Cp12.2@82.205,11.831 Cp15.2@100.549,11.831 ; 206.756,51.627 207.021,51.627 208.224,51.627 209.504,51.627 213.553,51.627 217.865,51.627 R340.1@222.156,51.627
  other v1: 172.003,20.975 175.791,20.975 172.003,22.393 175.791,22.393 172.003,23.734 175.737,23.734 172.003,25.065 175.737,25.065 172.003,26.175 175.736,26.174 172.003,27.406 175.736,27.406 183.737,32.272 176.496,33.539 177.484,33.539 176.521,46.093 177.414,46.892 175.867,46.947 176.892,47.777 177.852,48.623 200.738,50.5 201.853,50.5 203.057,50.5 204.337,50.5 203.017,51.719 204.297,51.719 200.738,51.789 201.853,51.789 175.647,52.247 176.521,52.993 200.716,52.985 201.853,52.985 203.017,52.985 204.356,52.985 175.647,53.74 177.298,53.823 175.647,54.886 176.781,54.886 177.852,54.886
I_OUT: C302.1 P1.10 R336.2 ZM1.2 | length 55.1
  Top Layer w0.8: P1.10@181.601,14.46 181.601,19.823 198.701,36.923 198.701,47.828 196.126,50.403 v1(193.871,50.403)
  Bottom Layer w0.8: R336.2@190.456,56.883 190.456,54.194 192.235,52.414 192.235,50.452 v1@193.827,50.452
INPUT_V: C705.2 C706.2 C707.2 P1.2 R709.2 R710.2 | length 14.5
  Bottom Layer w1: R710.2@157.784,4.006 161.398,4.006 R709.2@161.518,3.886 161.518,4.521 161.281,4.757 P1.2@161.281,14.46
ISO-15V: C320.1 R309.2 R312.1 R315.2 VR1.3 | length 53
  Top Layer w1: v1(224.778,96.113) 231.294,96.113 234.161,93.246 v1(234.161,90.472)
  Bottom Layer w1: 215.797,96.128 217.687,96.122 ; 217.836,96.122 217.687,96.122 ; C320.1@219.238,93.022 219.238,96.122 ; v1(224.778,96.113) 224.769,96.122 219.238,96.122 ; R309.2@234.161,92.387 v1(234.161,90.472) 234.161,84.949 235.334,83.776 249.185,83.776 R315.2@252.326,86.917 ; 217.687,96.122 219.238,96.122
ISO-17.5V: C319.1 P801.7 pad.12@199.02,82.071 VR1.1 | length 97.5
  Bottom Layer w1: P801.7@157.223,57.181 P801.7@157.263,57.181 ; P801.7@157.276,57.438 153.642,57.438 150.916,60.164 150.916,76.139 156.26,81.483 199.02,81.483 199.399,81.483 203.158,85.242 203.158,92.518 204.525,93.885 v1@206.423,93.885 ; v1@206.405,93.867 v1@206.423,93.885 ; C319.1@206.645,92.687 v1(206.645,94.107) v1@206.423,93.885 ; VR1.1@210.6,96.042 208.58,96.042 v1@206.423,93.885
ISO-GND: C305.1 C310.2 C312.2 C315.2 C319.2 C320.2 D301.1 L301.2 L301.6 L301.7 L301.8 P801.6 pad.12@201.409,79.22 R310.1 R319.1 R346.2 R347.2 R348.2 R352.2 U301.6 UX1.3 UX2.3 VR1.2 | length 144
  Bottom Layer w0.6: 244.846,95.069 v1(250.108,95.069)
  Bottom Layer w0.8: R319.1@245.528,88.939 245.528,90.263 244.476,91.315 244.476,97.12 v1(245.944,98.588) C315.2@245.944,99.59 ; v1(250.108,95.069) C310.2@252.326,95.008 252.385,95.067 v1(252.385,96.312) 252.385,97.556 C312.2@252.444,97.615
  Bottom Layer w1: P801.6@157.223,60 154.781,60 153.218,61.562 153.218,75.569 157.458,79.809 201.409,79.809 201.719,79.809 206.785,84.875 206.785,90.261 C319.2@206.645,90.401 v1(209.128,90.401) 210.608,90.401 212.957,88.052 215.306,90.401 v1(217.272,90.401) C320.2@219.238,90.401 ; R348.2@177.098,85.241 177.423,85.567 R348.2@177.468,85.567 ; UX2.3@212.704,75.486 v1(212.704,77.161) ; UX1.3@212.723,70.508 v1(213.937,70.508) ; C305.1@229.55,92.393 R310.1@231.952,92.393
  Bottom Layer w3.5: R352.2@172.154,85.88 176.982,85.88 181.373,85.88 186.344,85.88 189.606,85.88 D301.1@191.517,87.791
  other v1: 230.751,92.394
JDQ-C: P1.9 R350.1 | length 33.7
  Bottom Layer w0.8: P1.9@179.061,14.46 179.061,19.153 182.096,22.187 R350.1@206.858,22.187
L: BOX1.1 INPUT.1 pad.12@24.795,14.209
L6562-C: P1.7 UX1.1 | length 76.3
  Top Layer w0.8: P1.7@173.981,14.46 173.981,47.859 184.706,58.584 193.09,58.584 194.252,59.746 194.252,63.299 196.4,65.447 v1(203.892,65.447)
  Bottom Layer w0.6: v1@203.93,65.485 206.023,67.578 206.023,67.908 206.123,68.008 UX1.1@206.323,68.008
LED+: JDQ2.3 L302.3 | length 17.5
  Bottom Layer w3: L302.3@239.426,26.46 239.426,35.448 244.032,40.054 JDQ2.3@245.984,40.054
LED-: JDQ2.4 L302.1 | length 11.3
  Top Layer w3: L302.1@246.262,26.46 246.278,32.123 JDQ2.4@246.278,32.165
  Bottom Layer w3: L302.1@246.262,26.46 JDQ2.4@246.262,32.091
N: BOX2.2 INPUT.2 pad.12@16.453,14.209
NetBOX1_2: CA1.1 CA10.1 JDQ.2 L1.3 RF1.1
NetBOX2_1: BOX2.1 CA1.2 CA11.2 L1.1
NetC28_1: C28.1 D1.3 Lp1.12 Lp1.13 Lp1.14 Mp1.D | length 0
  Bottom Layer w2: D1.3@104.666,87.969 D1.3@104.698,87.969
NetC29_1: C29.1 D2.3 Lp2.12 Lp2.13 Lp2.14 Mp2.D | length 0.4
  Bottom Layer w1: Mp2.D@145.904,87.162 145.799,87.267 Mp2.D@145.948,87.416
NetC301_1: C301.1 R308.1 | length 6.4
  Bottom Layer w0.8: R308.1@179.378,61.496 C301.1@179.378,67.796
  Bottom Layer w1.2: R308.1@179.272,61.39 R308.1@179.378,61.496
NetC301_2: C301.2 C317.2 R316.2 U302.7 | length 10.1
  Bottom Layer w0.6: C317.2@181.664,65.766 U302.7@185.568,65.766
  Bottom Layer w0.8: R316.2@180.778,71.611 180.778,70.155 181.664,69.268 C301.2@181.664,67.796 C317.2@181.664,65.786 ; C317.2@181.643,65.786 C317.2@181.664,65.766
NetC303_1: C303.1 R313.1 U302.8 | length 6.8
  Bottom Layer w0.6: C303.1@183.905,69.061 183.905,67.854 184.723,67.036 U302.8@185.568,67.036 U302.8@186.408,67.036
  Bottom Layer w0.8: C303.1@183.905,69.061 C303.1@184.122,69.278 183.906,69.493 R313.1@183.906,71.587
NetC304_1: C304.1 R301.1 U301.2 | length 9.3
  Bottom Layer w0.6: 237.339,92.076 238.507,92.076 240.191,93.76 U301.2@241.671,93.76
  Bottom Layer w0.8: C304.1@237.039,90.735 237.039,91.844 237.039,92.328
  Bottom Layer w1: C304.1@237.039,90.472 237.039,91.844 R301.1@237.051,92.965 R301.1@237.053,93.12
NetC304_2: C304.2 R312.2 R319.2 R320.2 U301.1 | length 12.5
  Bottom Layer w0.8: R312.2@237.1,86.289 237.1,88.616 C304.2@237.026,88.69 239.701,88.69 240.251,89.24 R320.2@240.126,89.24 ; R320.2@239.928,89.24 R320.2@240.251,89.563 ; R320.2@240.353,89.24 241.617,89.24 ; U301.1@241.671,92.19 241.617,92.137 241.617,89.24 ; R319.2@243.308,89.04 243.108,89.24 241.617,89.24
NetC305_2: C305.2 R301.2 R309.1 R310.2 U301.3 UX2.4 | length 46.7
  Bottom Layer w0.6: R301.2@237.051,94.995 U301.3@242.326,94.995
  Bottom Layer w0.8: UX2.4@212.618,72.836 214.053,72.836 214.83,73.613 214.83,80.554 224.325,90.05 224.325,91.723 227.61,95.007 R301.2@237.051,95.007 ; 230.926,94.958 R309.1@233.701,94.958
NetC310_1: C310.1 R315.1 U301.8 | length 8
  Bottom Layer w1: U301.8@247.132,92.19 252.151,92.19 252.326,92.015 ; R315.1@252.326,89.965 252.326,92.015 ; C310.1@252.326,92.722 252.326,92.015
NetC312_1: C312.1 R325.1 U301.5 | length 6.9
  Bottom Layer w0.8: U301.5@246.757,96.59 U301.5@247.132,96.59 248.776,96.59 249.801,97.615 C312.1@250.158,97.615 R325.1@250.158,100.665